# Altium PCB Slot.PcbDoc (part 3 of 4)
Units mm, origin at the board's own origin, x right, y up, seen from the top; angles counter-clockwise.
Board outline 152.4 x 101.6 mm, 2 copper layers (Top Layer, Bottom Layer); 34 components, 37 nets, 230 pads, 62 vias.
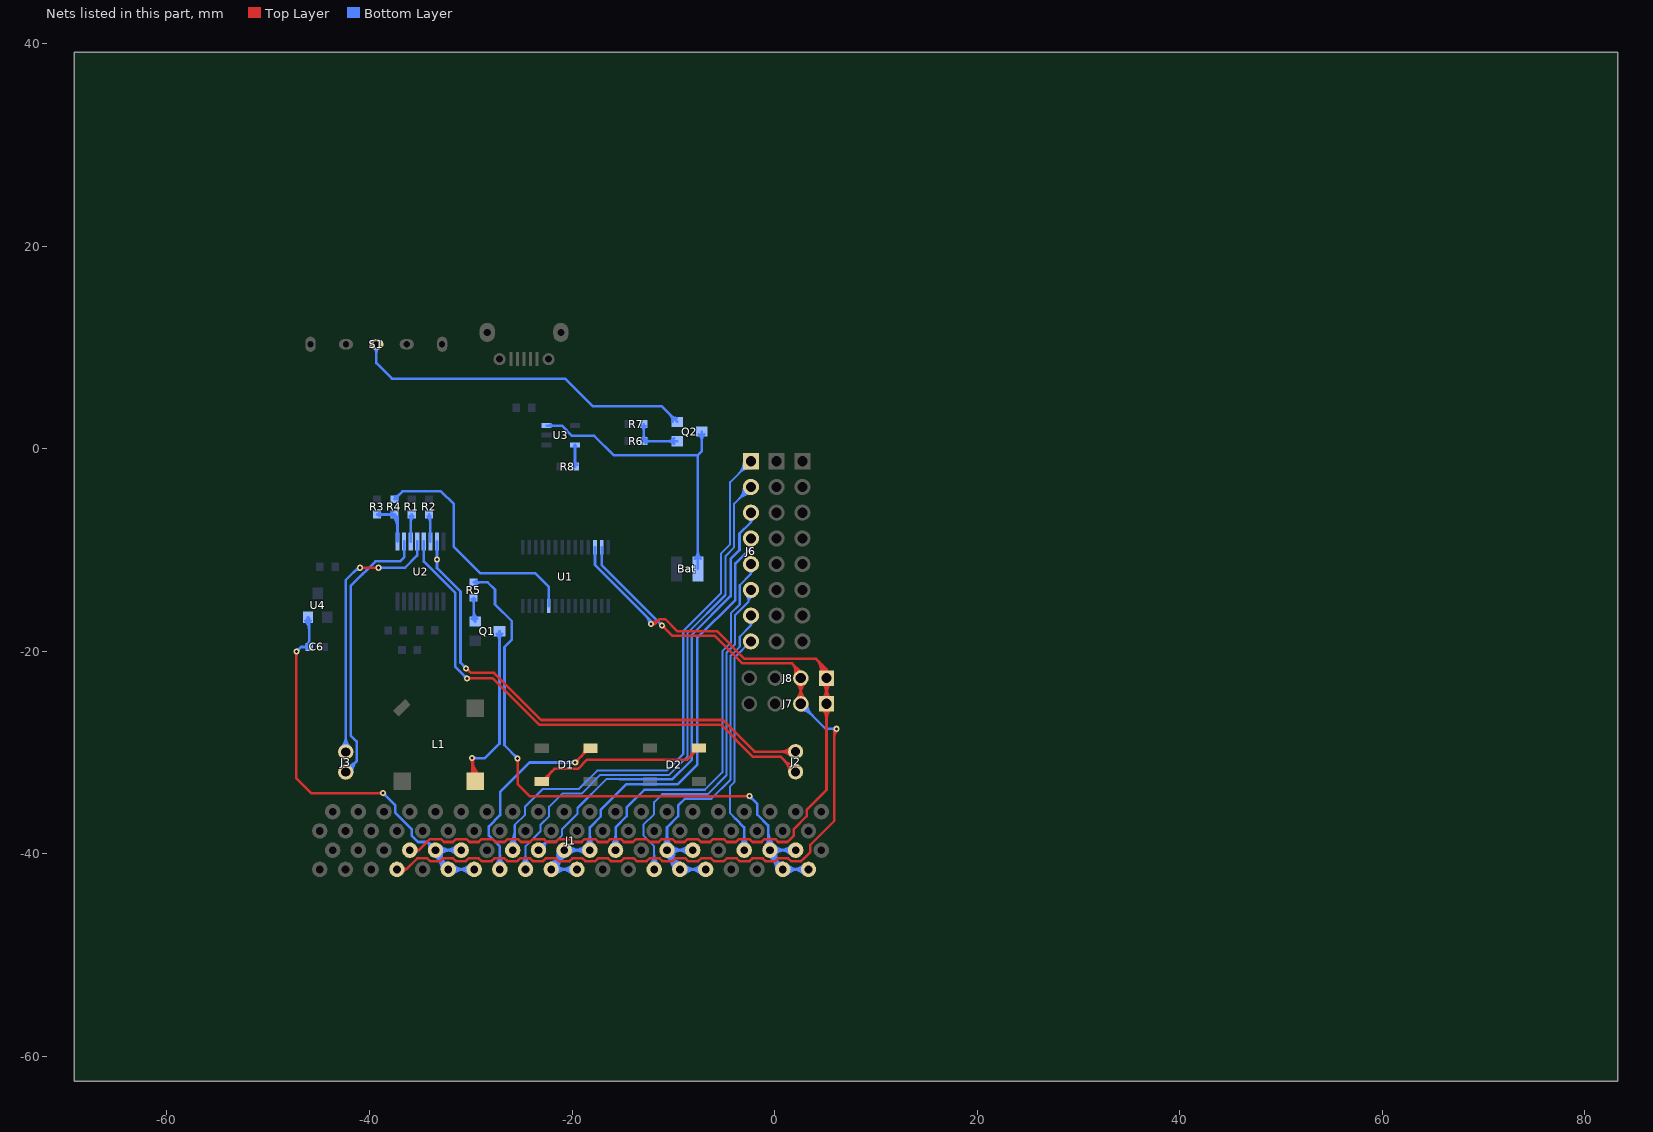
[diagram p3: the nets of this part, all layers, seen from the top]

## Via types
v1: diameter 0.6, hole 0.3, Top Layer to Bottom Layer, 62 vias

## Nets (pads, with @x,y where several pads share a name; then routed paths per layer and width w, separated by ;. In a path a pad name is that pad's centre, name@x,y a point inside that pad or via, vN(x,y) a via of type N, cw(c..) or ccw(c..) an arc to the next point about the centre after c; other vN are vias at no path point) (continued)
NetC6_2: C6.2 J1.55 J1.57 J1.59 J1.61 U4.2 | length 78.1
  Top Layer w0.254: -47.244,-20.53 cw(c-46.653,-20.53) v1@-47.071,-20.112 ; v1(-47.193,-19.99) -47.244,-20.041 -47.244,-32.512 -45.771,-33.985 v1(-38.659,-33.985) ; v1@-38.781,-34.108 ccw(c-39.076,-34.403) -39.076,-33.985 ccw(c-39.076,-33.568) v1@-38.781,-33.863
  Bottom Layer w0.254: v1(-47.193,-19.99) -46.761,-19.558 C6.2@-45.962,-19.558 -45.962,-16.746 U4.2@-46.071,-16.637 ; v1@-47.193,-19.817 ccw(c-47.193,-19.399) -46.898,-19.694 ccw(c-46.603,-19.99) v1@-47.02,-19.99 ; U4.2@-46.34,-16.97 cw(c-47.253,-17.882) -45.962,-17.882 ; U4.2@-46.16,-16.79 cw(c-46.639,-17.269) -45.962,-17.269 ; -45.962,-17.358 cw(c-45.413,-17.358) U4.2@-45.801,-16.97 ; v1@-38.659,-34.158 cw(c-38.659,-34.576) -38.363,-34.281 cw(c-38.068,-33.985) v1@-38.486,-33.985 ; v1(-38.659,-33.985) -37.468,-35.176 -37.468,-35.917 -35.842,-37.543 -35.842,-38.173 -35.202,-38.813 -34.288,-38.813 ; J1.61@-34.098,-39.477 ccw(c-34.79,-39.315) -34.288,-38.813 ; J1.61@-33.624,-39.003 cw(c-33.785,-38.311) -34.288,-38.813 ; J1.61@-33.606,-39.607 ccw(c-32.64,-39.716) -33.327,-40.403 ; J1.61@-33.48,-39.621 -34.288,-38.813 ; J1.61@-33.353,-39.635 ccw(c-31.971,-39.792) -32.955,-40.776 ; J1.61@-33.21,-39.89 cw(c-32.56,-40.541) -32.56,-39.621 cw(c-32.56,-38.701) J1.61@-33.21,-39.352 ; J1.61@-33.101,-39.664 ccw(c-31.302,-39.868) J1.59@-32.582,-41.148 ; J1.61@-33.031,-40.07 cw(c-31.947,-41.154) -31.947,-39.621 cw(c-31.947,-38.088) J1.61@-33.031,-39.172 ; J1.61@-32.849,-39.693 ccw(c-30.633,-39.944) J1.59@-32.21,-41.521 ; J1.59@-32.845,-41.521 ccw(c-34.378,-41.521) -33.294,-40.437 ccw(c-32.21,-39.353) J1.59@-32.21,-40.886 ; J1.59@-32.591,-41.521 ccw(c-33.51,-41.521) -32.86,-40.871 ccw(c-32.21,-40.22) J1.59@-32.21,-41.14 ; J1.59@-31.94,-41.79 cw(c-31.29,-42.441) -31.29,-41.521 cw(c-31.29,-40.601) J1.59@-31.94,-41.252 ; J1.59@-31.761,-41.97 cw(c-30.677,-43.054) -30.677,-41.521 cw(c-30.677,-39.988) J1.59@-31.761,-41.072 ; J1.57@-31.389,-40.07 ccw(c-32.473,-41.154) -32.473,-39.621 ccw(c-32.473,-38.088) J1.57@-31.389,-39.172 ; J1.57@-31.209,-39.89 ccw(c-31.859,-40.541) -31.859,-39.621 ccw(c-31.859,-38.701) J1.57@-31.209,-39.352 ; J1.57@-30.94,-39.621 -32.85,-39.621 -33.48,-40.251 J1.59@-32.21,-41.521 J1.55@-29.67,-41.521 ; J1.55@-30.119,-41.97 ccw(c-31.203,-43.054) -31.203,-41.521 ccw(c-31.203,-39.988) J1.55@-30.119,-41.072 ; J1.55@-29.939,-41.79 ccw(c-30.589,-42.441) -30.589,-41.521 ccw(c-30.589,-40.601) J1.55@-29.939,-41.252 ; -46.561,-19.558 ccw(c-46.561,-18.959) C6.2@-46.137,-19.383 ; -46.561,-19.558 cw(c-46.561,-20.157) C6.2@-46.137,-19.733 ; -46.561,-19.558 ccw(c-46.561,-18.959) C6.2@-46.137,-19.383 ; -46.561,-19.558 cw(c-46.561,-20.157) C6.2@-46.137,-19.733 ; -46.561,-19.558 ccw(c-46.561,-18.959) C6.2@-46.137,-19.383 ; -46.561,-19.558 cw(c-46.561,-20.157) C6.2@-46.137,-19.733 ; C6.2@-46.137,-19.358 ccw(c-46.561,-18.934) -45.962,-18.934 ; C6.2@-46.137,-19.358 ccw(c-46.561,-18.934) -45.962,-18.934 ; C6.2@-46.137,-19.358 ccw(c-46.561,-18.934) -45.962,-18.934 ; -45.962,-18.934 ccw(c-45.363,-18.934) C6.2@-45.787,-19.358 ; -45.962,-18.934 ccw(c-45.363,-18.934) C6.2@-45.787,-19.358 ; -45.962,-18.934 ccw(c-45.363,-18.934) C6.2@-45.787,-19.358
NetD1_2: D1.2 D2.4 | length 20.3
  Top Layer w0.254: D1.2@-22.989,-32.835 -21.747,-31.593 -19.424,-31.593 -18.515,-30.683 -8.611,-30.683 D2.4@-7.472,-29.544 ; D1.2@-22.67,-32.835 cw(c-21.9,-32.835) -22.445,-32.291 ; D1.2@-22.416,-32.835 cw(c-21.033,-32.835) -22.011,-31.857 ; -8.45,-30.522 ccw(c-9.429,-29.544) D2.4@-8.045,-29.544 ; -8.017,-30.089 ccw(c-8.561,-29.544) D2.4@-7.791,-29.544
NetJ2_1: J2.1 U2.7 | length 56
  Top Layer w0.254: v1@-30.455,-21.839 cw(c-30.455,-22.257) -30.159,-21.962 cw(c-29.864,-21.666) v1@-30.282,-21.666 ; v1(-30.455,-21.666) -29.997,-22.123 -27.7,-22.123 -23.052,-26.772 -5.105,-26.772 -1.988,-29.889 J2.1@2.08,-29.889 ; J2.1@1.64,-30.329 ccw(c0.576,-31.393) 0.576,-29.889 ccw(c0.576,-28.385) J2.1@1.64,-29.448 ; J2.1@1.819,-30.15 ccw(c1.19,-30.78) 1.19,-29.889 ccw(c1.19,-28.998) J2.1@1.819,-29.628
  Bottom Layer w0.254: v1@-33.459,-11.058 cw(c-33.754,-11.353) -33.336,-11.353 cw(c-32.919,-11.353) v1@-33.214,-11.058 ; v1@-33.459,-10.813 ccw(c-33.754,-10.518) -33.336,-10.518 ccw(c-32.919,-10.518) v1@-33.214,-10.813 ; U2.7@-33.336,-9.144 v1(-33.336,-10.936) -33.336,-11.774 -31.013,-14.097 -31.013,-21.107 v1(-30.455,-21.666) ; v1@-30.628,-21.666 ccw(c-31.045,-21.666) -30.75,-21.371 ccw(c-30.455,-21.076) v1@-30.455,-21.493
NetJ2_2: J2.2 U2.5 | length 56.6
  Top Layer w0.254: v1(-30.378,-22.657) -27.813,-22.657 -23.241,-27.229 -5.309,-27.229 -2.159,-30.378 0.57,-30.378 J2.2@2.08,-31.889 ; v1@-30.256,-22.779 cw(c-29.961,-23.074) -29.961,-22.657 cw(c-29.961,-22.239) v1@-30.256,-22.534 ; J2.2@1.457,-31.889 ccw(c-0.047,-31.889) 1.017,-30.825 ccw(c2.08,-29.762) J2.2@2.08,-31.266 ; J2.2@1.711,-31.889 ccw(c0.821,-31.889) 1.45,-31.259 ccw(c2.08,-30.629) J2.2@2.08,-31.52
  Bottom Layer w0.254: U2.5@-34.636,-9.144 -34.636,-11.12 -31.521,-14.235 -31.521,-21.514 v1(-30.378,-22.657) ; v1@-30.551,-22.657 ccw(c-30.969,-22.657) -30.674,-22.361 ccw(c-30.378,-22.066) v1@-30.378,-22.484
NetJ3_1: J3.1 U2.2 | length 30.8
  Bottom Layer w0.254: J3.1@-42.344,-31.921 -41.264,-30.841 -41.264,-28.878 -41.859,-28.283 -41.859,-13.538 -40.686,-12.365 -40.684,-12.365 -40.315,-11.996 -40.315,-11.994 -39.426,-11.105 -36.987,-11.105 -36.586,-10.704 U2.2@-36.586,-9.144 ; J3.1@-42.344,-31.552 ccw(c-42.344,-30.661) -41.714,-31.291 ccw(c-41.084,-31.921) J3.1@-41.975,-31.921 ; J3.1@-42.344,-31.298 ccw(c-42.344,-29.794) -41.281,-30.857 ccw(c-40.217,-31.921) J3.1@-41.721,-31.921
NetJ3_2: J3.2 U2.4 | length 34.1
  Top Layer w0.254: v1(-40.945,-11.735) v1(-39.091,-11.735) ; v1@-40.822,-11.857 cw(c-40.527,-12.152) -40.527,-11.735 cw(c-40.527,-11.317) v1@-40.822,-11.612 ; v1@-39.213,-11.857 ccw(c-39.508,-12.152) -39.508,-11.735 ccw(c-39.508,-11.317) v1@-39.213,-11.612
  Bottom Layer w0.254: J3.2@-42.785,-29.48 ccw(c-43.848,-28.417) -42.344,-28.417 ccw(c-40.84,-28.417) J3.2@-41.904,-29.48 ; J3.2@-42.605,-29.66 ccw(c-43.235,-29.03) -42.344,-29.03 ccw(c-41.453,-29.03) J3.2@-42.083,-29.66 ; J3.2@-42.344,-29.921 -42.344,-12.956 -41.123,-11.735 v1(-40.945,-11.735) ; v1(-39.091,-11.735) -36.474,-11.735 -35.286,-10.547 U2.4@-35.286,-9.144 ; v1@-38.968,-11.857 cw(c-38.673,-12.152) -38.673,-11.735 cw(c-38.673,-11.317) v1@-38.968,-11.612 ; -41.544,-12.156 cw(c-40.945,-12.755) v1@-40.945,-11.908 ; -41.544,-12.156 cw(c-40.945,-12.755) v1@-40.945,-11.908 ; -41.544,-12.156 cw(c-40.945,-12.755) v1@-40.945,-11.908
NetL1_2: L1.2 Q1.3 | length 25.4
  Top Layer w0.254: L1.2@-30.069,-32.3 ccw(c-30.548,-31.821) -29.87,-31.821 ; v1@-29.993,-30.653 cw(c-30.288,-30.948) -29.87,-30.948 cw(c-29.453,-30.948) v1@-29.748,-30.653 ; v1@-29.961,-30.678 cw(c-30.18,-31.033) -29.774,-30.937 cw(c-29.368,-30.841) v1@-29.723,-30.622 ; -29.87,-31.649 ccw(c-28.543,-31.649) L1.2@-29.416,-32.649 ; -29.87,-31.09 ccw(c-28.054,-31.09) L1.2@-29.249,-32.458 ; L1.2@-29.558,-32.811 -29.87,-32.498 v1(-29.87,-30.531) ccw(c-27.566,-30.531) L1.2@-29.082,-32.267
  Bottom Layer w0.254: v1(-29.87,-30.531) -28.6,-30.531 -27.166,-29.096 Q1.3@-27.166,-17.998 ; v1@-29.748,-30.653 cw(c-29.453,-30.948) -29.453,-30.531 cw(c-29.453,-30.113) v1@-29.748,-30.408 ; Q1.3@-27.435,-18.268 cw(c-28.085,-18.918) -27.166,-18.918 cw(c-26.246,-18.918) Q1.3@-26.896,-18.268
NetQ1_2: Q1.2 R5.2 | length 7.2
  Bottom Layer w0.254: Q1.2@-29.899,-16.779 ccw(c-30.334,-16.343) -29.718,-16.343 ; -29.718,-16.527 ccw(c-29.108,-16.527) Q1.2@-29.539,-16.959 ; -29.718,-15.914 ccw(c-28.495,-15.914) Q1.2@-29.36,-16.779 ; R5.2@-29.718,-14.683 -29.718,-16.896 Q1.2@-29.566,-17.048 ; R5.2@-29.893,-14.858 cw(c-30.317,-15.281) -29.718,-15.281 ; R5.2@-29.893,-14.858 cw(c-30.317,-15.281) -29.718,-15.281 ; R5.2@-29.893,-14.858 cw(c-30.317,-15.281) -29.718,-15.281 ; -29.718,-15.281 cw(c-29.119,-15.281) R5.2@-29.543,-14.858 ; -29.718,-15.281 cw(c-29.119,-15.281) R5.2@-29.543,-14.858 ; -29.718,-15.281 cw(c-29.119,-15.281) R5.2@-29.543,-14.858
NetQ2_1: Q2.1 R6.2 R7.2 | length 14.9
  Bottom Layer w0.254: R7.2@-12.923,2.454 R6.2@-12.923,0.762 Q2.1@-9.601,0.762 ; Q2.1@-9.934,0.493 ccw(c-10.585,-0.158) -10.585,0.762 ccw(c-10.585,1.682) Q2.1@-9.934,1.031 ; R6.2@-13.098,0.962 ccw(c-13.521,1.386) -12.923,1.386 ; R6.2@-13.098,0.962 ccw(c-13.521,1.386) -12.923,1.386 ; R6.2@-13.098,0.962 ccw(c-13.521,1.386) -12.923,1.386 ; R7.2@-13.098,2.254 cw(c-13.521,1.831) -12.923,1.831 ; R7.2@-13.098,2.254 cw(c-13.521,1.831) -12.923,1.831 ; R7.2@-13.098,2.254 cw(c-13.521,1.831) -12.923,1.831 ; -12.923,1.386 ccw(c-12.324,1.386) R6.2@-12.747,0.962 ; -12.923,1.386 ccw(c-12.324,1.386) R6.2@-12.747,0.962 ; -12.923,1.386 ccw(c-12.324,1.386) R6.2@-12.747,0.962 ; -12.923,1.831 cw(c-12.324,1.831) R7.2@-12.747,2.254 ; -12.923,1.831 cw(c-12.324,1.831) R7.2@-12.747,2.254 ; -12.923,1.831 cw(c-12.324,1.831) R7.2@-12.747,2.254 ; R6.2@-12.747,0.587 cw(c-12.324,0.163) -12.324,0.762 ; R6.2@-12.747,0.587 cw(c-12.324,0.163) -12.324,0.762 ; R6.2@-12.747,0.587 cw(c-12.324,0.163) -12.324,0.762 ; R6.2@-12.747,0.937 ccw(c-12.324,1.361) -12.324,0.762 ; R6.2@-12.747,0.937 ccw(c-12.324,1.361) -12.324,0.762 ; R6.2@-12.747,0.937 ccw(c-12.324,1.361) -12.324,0.762
NetQ2_2: Q2.2 S1.2 | length 36.9
  Bottom Layer w0.254: S1.2@-39.585,10.069 cw(c-40.222,9.432) -39.322,9.432 cw(c-38.421,9.432) S1.2@-39.058,10.069 ; S1.2@-39.322,10.333 -39.322,8.461 -37.795,6.934 -20.676,6.934 -17.932,4.191 -11.13,4.191 Q2.2@-9.601,2.662 ; -10.36,3.421 cw(c-11.119,2.662) Q2.2@-10.046,2.662 ; -10.207,3.268 ccw(c-9.665,3.81) Q2.2@-9.665,3.043
NetR1_1: R1.1 U2.3 | length 3.7
  Bottom Layer w0.254: R1.1@-36.027,-6.652 cw(c-36.246,-6.871) -35.936,-6.871 ; U2.3@-35.936,-9.144 -35.936,-6.587 R1.1@-35.827,-6.477 ; -35.936,-7.28 cw(c-35.048,-7.28) R1.1@-35.676,-6.652
NetR2_1: R2.1 U2.6 | length 3.5
  Bottom Layer w0.254: R2.1@-34.263,-6.652 cw(c-34.929,-7.319) -33.986,-7.319 ; R2.1@-34.112,-6.477 -33.986,-6.603 U2.6@-33.986,-9.144
NetR3_1: R3.1 R4.1 U2.1 | length 12.1
  Bottom Layer w0.254: R3.1@-39.243,-6.477 R4.1@-37.541,-6.477 -37.236,-6.782 U2.1@-37.236,-9.144 ; R4.1@-37.692,-6.652 cw(c-38.79,-7.751) -37.236,-7.751 ; R4.1@-37.512,-6.473 cw(c-38.177,-7.138) -37.236,-7.138 ; R3.1@-39.043,-6.652 cw(c-38.619,-7.076) -38.619,-6.477 ; R3.1@-39.043,-6.652 cw(c-38.619,-7.076) -38.619,-6.477 ; R3.1@-39.043,-6.652 cw(c-38.619,-7.076) -38.619,-6.477 ; R3.1@-39.043,-6.302 ccw(c-38.619,-5.878) -38.619,-6.477 ; R3.1@-39.043,-6.302 ccw(c-38.619,-5.878) -38.619,-6.477 ; R3.1@-39.043,-6.302 ccw(c-38.619,-5.878) -38.619,-6.477 ; -38.165,-6.477 ccw(c-38.165,-5.878) R4.1@-37.742,-6.302 ; -38.165,-6.477 cw(c-38.165,-7.076) R4.1@-37.742,-6.652 ; -38.165,-6.477 ccw(c-38.165,-5.878) R4.1@-37.742,-6.302 ; -38.165,-6.477 cw(c-38.165,-7.076) R4.1@-37.742,-6.652 ; -38.165,-6.477 ccw(c-38.165,-5.878) R4.1@-37.742,-6.302 ; -38.165,-6.477 cw(c-38.165,-7.076) R4.1@-37.742,-6.652
NetR8_2: R8.2 U3.5 | length 4.5
  Bottom Layer w0.254: R8.2@-19.859,-1.552 ccw(c-20.232,-1.179) -19.704,-1.179 ; -19.704,-1.079 ccw(c-19.035,-1.079) R8.2@-19.508,-1.552 ; U3.5@-19.704,0.406 -19.704,-1.732 R8.2@-19.684,-1.753 ; U3.5@-19.791,0.319 cw(c-20.001,0.109) -19.704,0.109 ; U3.5@-19.791,0.319 cw(c-20.001,0.109) -19.704,0.109 ; U3.5@-19.791,0.319 cw(c-20.001,0.109) -19.704,0.109 ; -19.704,0.109 cw(c-19.407,0.109) U3.5@-19.617,0.319 ; -19.704,0.109 cw(c-19.407,0.109) U3.5@-19.617,0.319 ; -19.704,0.109 cw(c-19.407,0.109) U3.5@-19.617,0.319
NSLEEP: R4.2 U1.10 | length 24.8
  Bottom Layer w0.254: R4.2@-37.541,-4.977 -36.755,-4.191 -32.944,-4.191 -31.674,-5.461 -31.674,-9.677 -29.058,-12.294 -23.622,-12.294 -22.284,-13.632 U1.10@-22.284,-15.519 ; R4.2@-37.516,-4.729 ccw(c-37.516,-4.191) -37.136,-4.571 ; R4.2@-37.268,-4.977 cw(c-36.609,-4.977) -37.075,-4.511
P0: J1.3 J1.5 J1.7 J1.9 R5.1 | length 93.7
  Top Layer w0.254: v1@-25.497,-30.679 cw(c-25.792,-30.974) -25.375,-30.974 cw(c-24.957,-30.974) v1@-25.252,-30.679 ; v1(-25.375,-30.556) -25.375,-33.096 -24.181,-34.29 v1(-2.464,-34.29) ; v1@-2.586,-34.412 ccw(c-2.881,-34.708) -2.881,-34.29 ccw(c-2.881,-33.872) v1@-2.586,-34.168
  Bottom Layer w0.254: R5.1@-29.718,-13.183 -28.321,-13.183 -27.61,-13.894 -27.61,-15.342 -25.933,-17.018 -25.933,-18.821 -26.67,-19.558 -26.67,-29.261 v1(-25.375,-30.556) ; v1@-25.548,-30.556 ccw(c-25.965,-30.556) -25.67,-30.261 ccw(c-25.375,-29.966) v1@-25.375,-30.383 ; v1@-2.464,-34.463 cw(c-2.464,-34.881) -2.168,-34.585 cw(c-1.873,-34.29) v1@-2.291,-34.29 ; v1(-2.464,-34.29) -1.702,-35.052 -1.702,-36.123 -0.638,-37.187 -0.638,-39.443 J1.9@-0.46,-39.621 J1.5@2.08,-39.621 ; J1.9@-0.909,-39.172 ccw(c-1.563,-38.518) -0.638,-38.518 ; -0.638,-38.271 ccw(c0.89,-38.271) -0.19,-39.352 ccw(c0.46,-38.701) 0.46,-39.621 ccw(c0.46,-40.541) J1.9@-0.19,-39.89 ; -0.638,-37.658 ccw(c1.503,-37.658) -0.011,-39.172 ccw(c1.073,-38.088) 1.073,-39.621 ccw(c1.073,-41.154) J1.9@-0.011,-40.07 ; J1.9@-0.586,-39.607 ccw(c0.38,-39.716) -0.307,-40.403 ; J1.9@-0.46,-40.251 J1.7@0.81,-41.521 J1.3@3.35,-41.521 ; J1.9@-0.333,-39.635 ccw(c1.049,-39.792) 0.065,-40.776 ; J1.9@-0.081,-39.664 ccw(c1.718,-39.868) J1.7@0.438,-41.148 ; J1.9@0.171,-39.693 ccw(c2.387,-39.944) J1.7@0.81,-41.521 ; J1.7@0.175,-41.521 ccw(c-1.358,-41.521) -0.274,-40.437 ccw(c0.81,-39.353) J1.7@0.81,-40.886 ; J1.7@0.429,-41.521 ccw(c-0.49,-41.521) 0.16,-40.871 ccw(c0.81,-40.22) J1.7@0.81,-41.14 ; J1.7@1.08,-41.79 cw(c1.73,-42.441) 1.73,-41.521 cw(c1.73,-40.601) J1.7@1.08,-41.252 ; J1.7@1.259,-41.97 cw(c2.343,-43.054) 2.343,-41.521 cw(c2.343,-39.988) J1.7@1.259,-41.072 ; J1.5@1.631,-40.07 ccw(c0.547,-41.154) 0.547,-39.621 ccw(c0.547,-38.088) J1.5@1.631,-39.172 ; J1.5@1.811,-39.89 ccw(c1.161,-40.541) 1.161,-39.621 ccw(c1.161,-38.701) J1.5@1.811,-39.352 ; J1.3@2.901,-41.97 ccw(c1.817,-43.054) 1.817,-41.521 ccw(c1.817,-39.988) J1.3@2.901,-41.072 ; J1.3@3.081,-41.79 ccw(c2.431,-42.441) 2.431,-41.521 ccw(c2.431,-40.601) J1.3@3.081,-41.252 ; R5.1@-29.518,-13.358 cw(c-29.094,-13.781) -29.094,-13.183 ; R5.1@-29.518,-13.358 cw(c-29.094,-13.781) -29.094,-13.183 ; R5.1@-29.518,-13.358 cw(c-29.094,-13.781) -29.094,-13.183 ; R5.1@-29.518,-13.007 ccw(c-29.094,-12.584) -29.094,-13.183 ; R5.1@-29.518,-13.007 ccw(c-29.094,-12.584) -29.094,-13.183 ; R5.1@-29.518,-13.007 ccw(c-29.094,-12.584) -29.094,-13.183
P1: J1.19 J1.21 J1.23 J1.25 J6.7 | length 166.4
  Bottom Layer w0.203: -8.866,-34.545 -6.25,-34.545 -4.344,-32.639 -4.344,-20.422 -3.441,-19.52 -3.441,-18.542 -2.337,-17.437 ; J6.7@-2.337,-16.459 -2.337,-17.437 ; J6.7@-2.563,-17.12 cw(c-2.672,-17.437) -2.337,-17.437 ; J6.7@-2.563,-17.12 cw(c-2.672,-17.437) -2.337,-17.437 ; J6.7@-2.563,-17.12 cw(c-2.672,-17.437) -2.337,-17.437 ; -2.337,-17.437 cw(c-2.001,-17.437) J6.7@-2.11,-17.12 ; -2.337,-17.437 cw(c-2.001,-17.437) J6.7@-2.11,-17.12 ; -2.337,-17.437 cw(c-2.001,-17.437) J6.7@-2.11,-17.12
  Bottom Layer w0.254: J1.25@-10.62,-39.621 -10.62,-37.365 -9.528,-36.273 -9.528,-35.207 -8.866,-34.545 ; -9.945,-40.63 cw(c-10.223,-41.342) J1.23@-9.474,-41.495 ; -9.664,-40.74 cw(c-9.923,-41.403) J1.23@-9.225,-41.547 ; J1.21@-8.08,-39.621 -9.99,-39.621 -10.62,-40.251 J1.23@-9.35,-41.521 J1.19@-6.81,-41.521 ; J1.25@-11.069,-39.172 ccw(c-12.153,-38.088) -10.62,-38.088 ; J1.25@-11.069,-39.172 ccw(c-12.153,-38.088) -10.62,-38.088 ; J1.25@-11.069,-39.172 ccw(c-12.153,-38.088) -10.62,-38.088 ; J1.25@-10.889,-39.352 ccw(c-11.539,-38.701) -10.62,-38.701 ; J1.25@-10.889,-39.352 ccw(c-11.539,-38.701) -10.62,-38.701 ; J1.25@-10.889,-39.352 ccw(c-11.539,-38.701) -10.62,-38.701 ; J1.25@-10.746,-39.607 ccw(c-9.78,-39.716) -10.467,-40.403 ; J1.25@-10.746,-39.607 ccw(c-9.78,-39.716) -10.467,-40.403 ; J1.25@-10.746,-39.607 ccw(c-9.78,-39.716) -10.467,-40.403 ; J1.25@-10.689,-39.727 cw(c-11.427,-40.858) -10.092,-40.657 ; J1.25@-10.689,-39.727 cw(c-11.427,-40.858) -10.092,-40.657 ; J1.25@-10.689,-39.727 cw(c-11.427,-40.858) -10.092,-40.657 ; J1.25@-10.62,-40.256 cw(c-10.62,-41.166) -9.976,-40.522 ; J1.25@-10.62,-40.256 cw(c-10.62,-41.166) -9.976,-40.522 ; J1.25@-10.62,-40.256 cw(c-10.62,-41.166) -9.976,-40.522 ; J1.25@-10.62,-40.256 cw(c-10.62,-41.166) -9.976,-40.522 ; -10.62,-38.701 ccw(c-9.7,-38.701) J1.25@-10.35,-39.352 ; -10.62,-38.701 ccw(c-9.7,-38.701) J1.25@-10.35,-39.352 ; -10.62,-38.701 ccw(c-9.7,-38.701) J1.25@-10.35,-39.352 ; -10.62,-38.088 ccw(c-9.087,-38.088) J1.25@-10.171,-39.172 ; -10.62,-38.088 ccw(c-9.087,-38.088) J1.25@-10.171,-39.172 ; -10.62,-38.088 ccw(c-9.087,-38.088) J1.25@-10.171,-39.172 ; J1.25@-10.544,-39.519 cw(c-11.607,-40.956) -9.839,-40.691 ; J1.25@-10.544,-39.519 cw(c-11.607,-40.956) -9.839,-40.691 ; J1.25@-10.544,-39.519 cw(c-11.607,-40.956) -9.839,-40.691 ; J1.25@-10.493,-39.635 ccw(c-9.111,-39.792) -10.095,-40.776 ; J1.25@-10.493,-39.635 ccw(c-9.111,-39.792) -10.095,-40.776 ; J1.25@-10.493,-39.635 ccw(c-9.111,-39.792) -10.095,-40.776 ; -10.434,-40.437 ccw(c-9.35,-39.353) J1.23@-9.35,-40.886 ; -10.434,-40.437 cw(c-11.518,-41.521) J1.23@-9.985,-41.521 ; -10.434,-40.437 ccw(c-9.35,-39.353) J1.23@-9.35,-40.886 ; -10.434,-40.437 cw(c-11.518,-41.521) J1.23@-9.985,-41.521 ; -10.434,-40.437 ccw(c-9.35,-39.353) J1.23@-9.35,-40.886 ; -10.434,-40.437 cw(c-11.518,-41.521) J1.23@-9.985,-41.521 ; J1.25@-10.393,-39.315 cw(c-11.091,-40.259) -9.93,-40.085 ; J1.25@-10.393,-39.315 cw(c-11.091,-40.259) -9.93,-40.085 ; J1.25@-10.393,-39.315 cw(c-11.091,-40.259) -9.93,-40.085 ; J1.25@-10.35,-39.89 cw(c-9.7,-40.541) -9.7,-39.621 ; J1.25@-10.35,-39.89 cw(c-9.7,-40.541) -9.7,-39.621 ; J1.25@-10.35,-39.89 cw(c-9.7,-40.541) -9.7,-39.621 ; J1.25@-10.35,-39.352 ccw(c-9.7,-38.701) -9.7,-39.621 ; J1.25@-10.35,-39.352 ccw(c-9.7,-38.701) -9.7,-39.621 ; J1.25@-10.35,-39.352 ccw(c-9.7,-38.701) -9.7,-39.621 ; J1.25@-10.254,-39.727 ccw(c-9.573,-39.924) -10.074,-40.425 ; J1.25@-10.254,-39.727 ccw(c-9.573,-39.924) -10.074,-40.425 ; J1.25@-10.254,-39.727 ccw(c-9.573,-39.924) -10.074,-40.425 ; J1.25@-10.254,-39.727 ccw(c-9.573,-39.924) -10.074,-40.425 ; J1.25@-10.241,-39.664 ccw(c-8.442,-39.868) J1.23@-9.722,-41.148 ; J1.25@-10.241,-39.664 ccw(c-8.442,-39.868) J1.23@-9.722,-41.148 ; J1.25@-10.241,-39.664 ccw(c-8.442,-39.868) J1.23@-9.722,-41.148 ; J1.25@-10.23,-40.269 ccw(c-9.141,-39.64) J1.23@-9.28,-40.89 ; J1.25@-10.23,-40.269 ccw(c-9.141,-39.64) J1.23@-9.28,-40.89 ; J1.25@-10.23,-40.269 ccw(c-9.141,-39.64) J1.23@-9.28,-40.89 ; J1.25@-10.171,-40.07 cw(c-9.087,-41.154) -9.087,-39.621 ; J1.25@-10.171,-40.07 cw(c-9.087,-41.154) -9.087,-39.621 ; J1.25@-10.171,-40.07 cw(c-9.087,-41.154) -9.087,-39.621 ; J1.25@-10.171,-39.172 ccw(c-9.087,-38.088) -9.087,-39.621 ; J1.25@-10.171,-39.172 ccw(c-9.087,-38.088) -9.087,-39.621 ; J1.25@-10.171,-39.172 ccw(c-9.087,-38.088) -9.087,-39.621 ; -10.146,-40.919 ccw(c-9.173,-40.659) J1.23@-9.375,-41.645 ; -10.146,-40.919 ccw(c-9.173,-40.659) J1.23@-9.375,-41.645 ; -10.146,-40.919 ccw(c-9.173,-40.659) J1.23@-9.375,-41.645 ; -10.07,-40.547 cw(c-10.994,-41.08) J1.23@-9.963,-41.357 ; -10.07,-40.547 cw(c-10.994,-41.08) J1.23@-9.963,-41.357 ; -10.07,-40.547 cw(c-10.994,-41.08) J1.23@-9.963,-41.357 ; J1.25@-10.01,-39.797 ccw(c-9.101,-40.06) -9.77,-40.729 ; J1.25@-10.01,-39.797 ccw(c-9.101,-40.06) -9.77,-40.729 ; J1.25@-10.01,-39.797 ccw(c-9.101,-40.06) -9.77,-40.729 ; J1.25@-10.01,-39.797 ccw(c-9.101,-40.06) -9.77,-40.729 ; -10,-40.871 ccw(c-9.35,-40.22) J1.23@-9.35,-41.14 ; -10,-40.871 cw(c-10.65,-41.521) J1.23@-9.731,-41.521 ; -10,-40.871 ccw(c-9.35,-40.22) J1.23@-9.35,-41.14 ; -10,-40.871 cw(c-10.65,-41.521) J1.23@-9.731,-41.521 ; -10,-40.871 ccw(c-9.35,-40.22) J1.23@-9.35,-41.14 ; -10,-40.871 cw(c-10.65,-41.521) J1.23@-9.731,-41.521 ; J1.25@-9.989,-39.693 ccw(c-7.773,-39.944) J1.23@-9.35,-41.521 ; J1.25@-9.989,-39.693 ccw(c-7.773,-39.944) J1.23@-9.35,-41.521 ; J1.25@-9.989,-39.693 ccw(c-7.773,-39.944) J1.23@-9.35,-41.521 ; -9.979,-40.703 ccw(c-9.209,-40.259) J1.23@-9.308,-41.142 ; -9.979,-40.703 ccw(c-9.209,-40.259) J1.23@-9.308,-41.142 ; -9.979,-40.703 ccw(c-9.209,-40.259) J1.23@-9.308,-41.142 ; -9.951,-40.725 cw(c-10.212,-41.698) J1.23@-9.225,-41.496 ; -9.951,-40.725 cw(c-10.212,-41.698) J1.23@-9.225,-41.496 ; -9.951,-40.725 cw(c-10.212,-41.698) J1.23@-9.225,-41.496 ; -9.927,-40.521 ccw(c-9.293,-40.155) J1.23@-9.323,-40.887 ; -9.927,-40.521 cw(c-10.561,-40.887) J1.23@-9.912,-41.227 ; -9.927,-40.521 ccw(c-9.293,-40.155) J1.23@-9.323,-40.887 ; -9.927,-40.521 cw(c-10.561,-40.887) J1.23@-9.912,-41.227 ; -9.927,-40.521 ccw(c-9.293,-40.155) J1.23@-9.323,-40.887 ; -9.927,-40.521 cw(c-10.561,-40.887) J1.23@-9.912,-41.227 ; -9.613,-39.621 ccw(c-9.613,-38.088) J1.21@-8.529,-39.172 ; -9.613,-39.621 cw(c-9.613,-41.154) J1.21@-8.529,-40.07 ; -9.613,-39.621 ccw(c-9.613,-38.088) J1.21@-8.529,-39.172 ; -9.613,-39.621 cw(c-9.613,-41.154) J1.21@-8.529,-40.07 ; -9.613,-39.621 ccw(c-9.613,-38.088) J1.21@-8.529,-39.172 ; -9.613,-39.621 cw(c-9.613,-41.154) J1.21@-8.529,-40.07 ; J1.23@-9.08,-41.79 cw(c-8.43,-42.441) -8.43,-41.521 ; J1.23@-9.08,-41.79 cw(c-8.43,-42.441) -8.43,-41.521 ; J1.23@-9.08,-41.79 cw(c-8.43,-42.441) -8.43,-41.521 ; J1.23@-9.08,-41.252 ccw(c-8.43,-40.601) -8.43,-41.521 ; J1.23@-9.08,-41.252 ccw(c-8.43,-40.601) -8.43,-41.521 ; J1.23@-9.08,-41.252 ccw(c-8.43,-40.601) -8.43,-41.521 ; -8.999,-39.621 ccw(c-8.999,-38.701) J1.21@-8.349,-39.352 ; -8.999,-39.621 cw(c-8.999,-40.541) J1.21@-8.349,-39.89 ; -8.999,-39.621 ccw(c-8.999,-38.701) J1.21@-8.349,-39.352 ; -8.999,-39.621 cw(c-8.999,-40.541) J1.21@-8.349,-39.89 ; -8.999,-39.621 ccw(c-8.999,-38.701) J1.21@-8.349,-39.352 ; -8.999,-39.621 cw(c-8.999,-40.541) J1.21@-8.349,-39.89 ; J1.23@-8.901,-41.97 cw(c-7.817,-43.054) -7.817,-41.521 ; J1.23@-8.901,-41.97 cw(c-7.817,-43.054) -7.817,-41.521 ; J1.23@-8.901,-41.97 cw(c-7.817,-43.054) -7.817,-41.521 ; J1.23@-8.901,-41.072 ccw(c-7.817,-39.988) -7.817,-41.521 ; J1.23@-8.901,-41.072 ccw(c-7.817,-39.988) -7.817,-41.521 ; J1.23@-8.901,-41.072 ccw(c-7.817,-39.988) -7.817,-41.521 ; -8.343,-41.521 ccw(c-8.343,-39.988) J1.19@-7.259,-41.072 ; -8.343,-41.521 cw(c-8.343,-43.054) J1.19@-7.259,-41.97 ; -8.343,-41.521 ccw(c-8.343,-39.988) J1.19@-7.259,-41.072 ; -8.343,-41.521 cw(c-8.343,-43.054) J1.19@-7.259,-41.97 ; -8.343,-41.521 ccw(c-8.343,-39.988) J1.19@-7.259,-41.072 ; -8.343,-41.521 cw(c-8.343,-43.054) J1.19@-7.259,-41.97 ; -7.729,-41.521 ccw(c-7.729,-40.601) J1.19@-7.079,-41.252 ; -7.729,-41.521 cw(c-7.729,-42.441) J1.19@-7.079,-41.79 ; -7.729,-41.521 ccw(c-7.729,-40.601) J1.19@-7.079,-41.252 ; -7.729,-41.521 cw(c-7.729,-42.441) J1.19@-7.079,-41.79 ; -7.729,-41.521 ccw(c-7.729,-40.601) J1.19@-7.079,-41.252 ; -7.729,-41.521 cw(c-7.729,-42.441) J1.19@-7.079,-41.79
P2: J1.37 J1.39 J1.41 J1.43 J6.4 | length 178.5
  Bottom Layer w0.254: J1.43@-22.174,-41.547 cw(c-21.476,-41.403) -21.735,-40.74 ; J1.43@-21.925,-41.495 cw(c-21.177,-41.342) -21.455,-40.63 ; J1.39@-19.51,-41.521 J1.43@-22.05,-41.521 ; J6.4@-2.337,-8.839 -2.337,-9.781 ; J1.43@-22.174,-41.496 cw(c-21.187,-41.698) -21.448,-40.725 ; J1.43@-22.174,-41.496 cw(c-21.187,-41.698) -21.448,-40.725 ; J1.43@-22.174,-41.496 cw(c-21.187,-41.698) -21.448,-40.725 ; J1.43@-22.12,-40.89 ccw(c-22.258,-39.64) J1.41@-21.169,-40.269 ; J1.43@-22.12,-40.89 ccw(c-22.258,-39.64) J1.41@-21.169,-40.269 ; J1.43@-22.12,-40.89 ccw(c-22.258,-39.64) J1.41@-21.169,-40.269 ; J1.43@-22.092,-41.142 ccw(c-22.19,-40.259) -21.42,-40.703 ; J1.43@-22.092,-41.142 ccw(c-22.19,-40.259) -21.42,-40.703 ; J1.43@-22.092,-41.142 ccw(c-22.19,-40.259) -21.42,-40.703 ; J1.43@-22.076,-40.887 ccw(c-22.106,-40.155) -21.472,-40.521 ; J1.43@-22.076,-40.887 ccw(c-22.106,-40.155) -21.472,-40.521 ; J1.43@-22.076,-40.887 ccw(c-22.106,-40.155) -21.472,-40.521 ; J1.43@-22.05,-41.521 ccw(c-23.626,-39.944) J1.41@-21.411,-39.693 ; J1.43@-22.05,-41.521 ccw(c-23.626,-39.944) J1.41@-21.411,-39.693 ; J1.43@-22.05,-41.521 ccw(c-23.626,-39.944) J1.41@-21.411,-39.693 ; J1.43@-22.05,-41.521 -20.15,-39.621 J1.37@-18.24,-39.621 -18.24,-37.365 -17.148,-36.273 -17.148,-35.613 -14.656,-33.122 -9.576,-33.122 -7.645,-31.191 -7.645,-18.694 -3.873,-14.922 -3.873,-11.317 -2.337,-9.781 ; J1.43@-22.05,-41.14 ccw(c-22.05,-40.22) -21.399,-40.871 ; J1.43@-22.05,-41.14 ccw(c-22.05,-40.22) -21.399,-40.871 ; J1.43@-22.05,-41.14 ccw(c-22.05,-40.22) -21.399,-40.871 ; J1.43@-22.05,-40.886 ccw(c-22.05,-39.353) -20.966,-40.437 ; J1.43@-22.05,-40.886 ccw(c-22.05,-39.353) -20.966,-40.437 ; J1.43@-22.05,-40.886 ccw(c-22.05,-39.353) -20.966,-40.437 ; J1.43@-22.024,-41.645 ccw(c-22.226,-40.659) -21.253,-40.919 ; J1.43@-22.024,-41.645 ccw(c-22.226,-40.659) -21.253,-40.919 ; J1.43@-22.024,-41.645 ccw(c-22.226,-40.659) -21.253,-40.919 ; J1.43@-21.78,-41.79 cw(c-21.13,-42.441) -21.13,-41.521 ; J1.43@-21.78,-41.79 cw(c-21.13,-42.441) -21.13,-41.521 ; J1.43@-21.78,-41.79 cw(c-21.13,-42.441) -21.13,-41.521 ; J1.43@-21.78,-41.252 ccw(c-21.13,-40.601) -21.13,-41.521 ; J1.43@-21.78,-41.252 ccw(c-21.13,-40.601) -21.13,-41.521 ; J1.43@-21.78,-41.252 ccw(c-21.13,-40.601) -21.13,-41.521 ; J1.43@-21.677,-41.148 ccw(c-22.957,-39.868) J1.41@-21.158,-39.664 ; J1.43@-21.677,-41.148 ccw(c-22.957,-39.868) J1.41@-21.158,-39.664 ; J1.43@-21.677,-41.148 ccw(c-22.957,-39.868) J1.41@-21.158,-39.664 ; J1.43@-21.669,-41.521 cw(c-20.749,-41.521) -21.399,-40.871 ; J1.43@-21.669,-41.521 cw(c-20.749,-41.521) -21.399,-40.871 ; J1.43@-21.669,-41.521 cw(c-20.749,-41.521) -21.399,-40.871 ; -21.629,-40.729 ccw(c-22.298,-40.06) J1.41@-21.39,-39.797 ; -21.629,-40.729 ccw(c-22.298,-40.06) J1.41@-21.39,-39.797 ; -21.629,-40.729 ccw(c-22.298,-40.06) J1.41@-21.39,-39.797 ; -21.629,-40.729 ccw(c-22.298,-40.06) J1.41@-21.39,-39.797 ; J1.43@-21.601,-41.97 cw(c-20.517,-43.054) -20.517,-41.521 ; J1.43@-21.601,-41.97 cw(c-20.517,-43.054) -20.517,-41.521 ; J1.43@-21.601,-41.97 cw(c-20.517,-43.054) -20.517,-41.521 ; J1.43@-21.601,-41.072 ccw(c-20.517,-39.988) -20.517,-41.521 ; J1.43@-21.601,-41.072 ccw(c-20.517,-39.988) -20.517,-41.521 ; J1.43@-21.601,-41.072 ccw(c-20.517,-39.988) -20.517,-41.521 ; -21.56,-40.691 cw(c-19.793,-40.956) J1.41@-20.855,-39.519 ; -21.56,-40.691 cw(c-19.793,-40.956) J1.41@-20.855,-39.519 ; -21.56,-40.691 cw(c-19.793,-40.956) J1.41@-20.855,-39.519 ; J1.43@-21.487,-41.227 cw(c-20.838,-40.887) -21.472,-40.521 ; J1.43@-21.487,-41.227 cw(c-20.838,-40.887) -21.472,-40.521 ; J1.43@-21.487,-41.227 cw(c-20.838,-40.887) -21.472,-40.521 ; -21.469,-40.085 cw(c-20.308,-40.259) J1.41@-21.006,-39.315 ; -21.469,-40.085 cw(c-20.308,-40.259) J1.41@-21.006,-39.315 ; -21.469,-40.085 cw(c-20.308,-40.259) J1.41@-21.006,-39.315 ; J1.43@-21.436,-41.357 cw(c-20.405,-41.08) -21.33,-40.547 ; J1.43@-21.436,-41.357 cw(c-20.405,-41.08) -21.33,-40.547 ; J1.43@-21.436,-41.357 cw(c-20.405,-41.08) -21.33,-40.547 ; -21.423,-40.522 cw(c-20.78,-41.166) J1.41@-20.78,-40.256 ; -21.423,-40.522 cw(c-20.78,-41.166) J1.41@-20.78,-40.256 ; -21.423,-40.522 cw(c-20.78,-41.166) J1.41@-20.78,-40.256 ; -21.423,-40.522 cw(c-20.78,-41.166) J1.41@-20.78,-40.256 ; J1.43@-21.415,-41.521 cw(c-19.882,-41.521) -20.966,-40.437 ; J1.43@-21.415,-41.521 cw(c-19.882,-41.521) -20.966,-40.437 ; J1.43@-21.415,-41.521 cw(c-19.882,-41.521) -20.966,-40.437 ; -21.325,-40.425 ccw(c-21.826,-39.924) J1.41@-21.146,-39.727 ; -21.325,-40.425 ccw(c-21.826,-39.924) J1.41@-21.146,-39.727 ; -21.325,-40.425 ccw(c-21.826,-39.924) J1.41@-21.146,-39.727 ; -21.325,-40.425 ccw(c-21.826,-39.924) J1.41@-21.146,-39.727 ; -21.307,-40.657 cw(c-19.972,-40.858) J1.41@-20.71,-39.727 ; -21.307,-40.657 cw(c-19.972,-40.858) J1.41@-20.71,-39.727 ; -21.307,-40.657 cw(c-19.972,-40.858) J1.41@-20.71,-39.727 ; -21.304,-40.776 ccw(c-22.288,-39.792) J1.41@-20.906,-39.635 ; -21.304,-40.776 ccw(c-22.288,-39.792) J1.41@-20.906,-39.635 ; -21.304,-40.776 ccw(c-22.288,-39.792) J1.41@-20.906,-39.635 ; -21.043,-41.521 ccw(c-21.043,-39.988) J1.39@-19.959,-41.072 ; -21.043,-41.521 cw(c-21.043,-43.054) J1.39@-19.959,-41.97 ; -21.043,-41.521 ccw(c-21.043,-39.988) J1.39@-19.959,-41.072 ; -21.043,-41.521 cw(c-21.043,-43.054) J1.39@-19.959,-41.97 ; -21.043,-41.521 ccw(c-21.043,-39.988) J1.39@-19.959,-41.072 ; -21.043,-41.521 cw(c-21.043,-43.054) J1.39@-19.959,-41.97 ; -20.932,-40.403 ccw(c-21.619,-39.716) J1.41@-20.653,-39.607 ; -20.932,-40.403 ccw(c-21.619,-39.716) J1.41@-20.653,-39.607 ; -20.932,-40.403 ccw(c-21.619,-39.716) J1.41@-20.653,-39.607 ; J1.41@-20.51,-39.89 cw(c-19.86,-40.541) -19.86,-39.621 ; J1.41@-20.51,-39.89 cw(c-19.86,-40.541) -19.86,-39.621 ; J1.41@-20.51,-39.89 cw(c-19.86,-40.541) -19.86,-39.621 ; J1.41@-20.51,-39.352 ccw(c-19.86,-38.701) -19.86,-39.621 ; J1.41@-20.51,-39.352 ccw(c-19.86,-38.701) -19.86,-39.621 ; J1.41@-20.51,-39.352 ccw(c-19.86,-38.701) -19.86,-39.621 ; -20.429,-41.521 ccw(c-20.429,-40.601) J1.39@-19.779,-41.252 ; -20.429,-41.521 cw(c-20.429,-42.441) J1.39@-19.779,-41.79 ; -20.429,-41.521 ccw(c-20.429,-40.601) J1.39@-19.779,-41.252 ; -20.429,-41.521 cw(c-20.429,-42.441) J1.39@-19.779,-41.79 ; -20.429,-41.521 ccw(c-20.429,-40.601) J1.39@-19.779,-41.252 ; -20.429,-41.521 cw(c-20.429,-42.441) J1.39@-19.779,-41.79 ; J1.41@-20.331,-40.07 cw(c-19.247,-41.154) -19.247,-39.621 ; J1.41@-20.331,-40.07 cw(c-19.247,-41.154) -19.247,-39.621 ; J1.41@-20.331,-40.07 cw(c-19.247,-41.154) -19.247,-39.621 ; J1.41@-20.331,-39.172 ccw(c-19.247,-38.088) -19.247,-39.621 ; J1.41@-20.331,-39.172 ccw(c-19.247,-38.088) -19.247,-39.621 ; J1.41@-20.331,-39.172 ccw(c-19.247,-38.088) -19.247,-39.621 ; -19.773,-39.621 ccw(c-19.773,-38.088) J1.37@-18.689,-39.172 ; -19.773,-39.621 cw(c-19.773,-41.154) J1.37@-18.689,-40.07 ; -19.773,-39.621 ccw(c-19.773,-38.088) J1.37@-18.689,-39.172 ; -19.773,-39.621 cw(c-19.773,-41.154) J1.37@-18.689,-40.07 ; -19.773,-39.621 ccw(c-19.773,-38.088) J1.37@-18.689,-39.172 ; -19.773,-39.621 cw(c-19.773,-41.154) J1.37@-18.689,-40.07 ; -19.159,-39.621 ccw(c-19.159,-38.701) J1.37@-18.509,-39.352 ; -19.159,-39.621 cw(c-19.159,-40.541) J1.37@-18.509,-39.89 ; -19.159,-39.621 ccw(c-19.159,-38.701) J1.37@-18.509,-39.352 ; -19.159,-39.621 cw(c-19.159,-40.541) J1.37@-18.509,-39.89 ; -19.159,-39.621 ccw(c-19.159,-38.701) J1.37@-18.509,-39.352 ; -19.159,-39.621 cw(c-19.159,-40.541) J1.37@-18.509,-39.89 ; J1.37@-18.689,-39.172 ccw(c-19.773,-38.088) -18.24,-38.088 ; J1.37@-18.689,-39.172 ccw(c-19.773,-38.088) -18.24,-38.088 ; J1.37@-18.689,-39.172 ccw(c-19.773,-38.088) -18.24,-38.088 ; J1.37@-18.509,-39.352 ccw(c-19.159,-38.701) -18.24,-38.701 ; J1.37@-18.509,-39.352 ccw(c-19.159,-38.701) -18.24,-38.701 ; J1.37@-18.509,-39.352 ccw(c-19.159,-38.701) -18.24,-38.701 ; -18.24,-38.701 ccw(c-17.32,-38.701) J1.37@-17.97,-39.352 ; -18.24,-38.701 ccw(c-17.32,-38.701) J1.37@-17.97,-39.352 ; -18.24,-38.701 ccw(c-17.32,-38.701) J1.37@-17.97,-39.352 ; -18.24,-38.088 ccw(c-16.707,-38.088) J1.37@-17.791,-39.172 ; -18.24,-38.088 ccw(c-16.707,-38.088) J1.37@-17.791,-39.172 ; -18.24,-38.088 ccw(c-16.707,-38.088) J1.37@-17.791,-39.172 ; J6.4@-2.555,-9.476 cw(c-2.659,-9.781) -2.337,-9.781 ; J6.4@-2.555,-9.476 cw(c-2.659,-9.781) -2.337,-9.781 ; J6.4@-2.555,-9.476 cw(c-2.659,-9.781) -2.337,-9.781 ; -2.337,-9.781 cw(c-2.014,-9.781) J6.4@-2.119,-9.476 ; -2.337,-9.781 cw(c-2.014,-9.781) J6.4@-2.119,-9.476 ; -2.337,-9.781 cw(c-2.014,-9.781) J6.4@-2.119,-9.476
P5: J1.13 J6.8 | length 33.6
  Bottom Layer w0.203: -3.861,-36.504 -4.394,-35.971 -4.394,-33.325 -3.938,-32.868 -3.938,-20.6 J6.8@-2.337,-18.999
  Bottom Layer w0.254: -3.861,-36.504 -3,-37.365 J1.13@-3,-39.621 ; J1.13@-3.449,-39.172 ccw(c-4.533,-38.088) -3,-38.088 ; J1.13@-3.449,-39.172 ccw(c-4.533,-38.088) -3,-38.088 ; J1.13@-3.449,-39.172 ccw(c-4.533,-38.088) -3,-38.088 ; J1.13@-3.269,-39.352 ccw(c-3.919,-38.701) -3,-38.701 ; J1.13@-3.269,-39.352 ccw(c-3.919,-38.701) -3,-38.701 ; J1.13@-3.269,-39.352 ccw(c-3.919,-38.701) -3,-38.701 ; -3,-38.701 ccw(c-2.08,-38.701) J1.13@-2.73,-39.352 ; -3,-38.701 ccw(c-2.08,-38.701) J1.13@-2.73,-39.352 ; -3,-38.701 ccw(c-2.08,-38.701) J1.13@-2.73,-39.352 ; -3,-38.088 ccw(c-1.467,-38.088) J1.13@-2.551,-39.172 ; -3,-38.088 ccw(c-1.467,-38.088) J1.13@-2.551,-39.172 ; -3,-38.088 ccw(c-1.467,-38.088) J1.13@-2.551,-39.172
P8: J1.27 J6.6 | length 49.8
  Bottom Layer w0.203: J1.27@-11.89,-41.521 -11.89,-39.229 -12.956,-38.163 -12.956,-37.126 -11.89,-36.059 -11.89,-34.877 -11.1,-34.087 -6.604,-34.087 -4.75,-32.233 -4.75,-20.142 -3.912,-19.304 -3.912,-16.412 -2.565,-15.064 -2.565,-14.147 J6.6@-2.337,-13.919 ; J6.6@-2.831,-14.413 cw(c-3.473,-15.055) -2.565,-15.055 ; -2.565,-15.087 cw(c-2.064,-15.087) J6.6@-2.178,-14.599 ; -2.565,-14.831 cw(c-2.124,-14.831) J6.6@-2.224,-14.401 ; J1.27@-12.357,-41.054 ccw(c-13.484,-39.927) -11.89,-39.927 ; J1.27@-12.357,-41.054 ccw(c-13.484,-39.927) -11.89,-39.927 ; J1.27@-12.357,-41.054 ccw(c-13.484,-39.927) -11.89,-39.927 ; J1.27@-12.213,-41.198 ccw(c-12.993,-40.417) -11.89,-40.417 ; J1.27@-12.213,-41.198 ccw(c-12.993,-40.417) -11.89,-40.417 ; J1.27@-12.213,-41.198 ccw(c-12.993,-40.417) -11.89,-40.417 ; -11.89,-40.417 ccw(c-10.786,-40.417) J1.27@-11.566,-41.198 ; -11.89,-40.417 ccw(c-10.786,-40.417) J1.27@-11.566,-41.198 ; -11.89,-40.417 ccw(c-10.786,-40.417) J1.27@-11.566,-41.198 ; -11.89,-39.927 ccw(c-10.295,-39.927) J1.27@-11.423,-41.054 ; -11.89,-39.927 ccw(c-10.295,-39.927) J1.27@-11.423,-41.054 ; -11.89,-39.927 ccw(c-10.295,-39.927) J1.27@-11.423,-41.054
P11: J1.33 J6.5 | length 51.3
  Bottom Layer w0.203: -12.852,-33.655 -6.883,-33.655 -5.156,-31.928 -5.156,-19.964 -4.318,-19.126 -4.318,-16.244 -3.441,-15.367 -3.441,-13.462 -2.337,-12.357 ; J6.5@-2.337,-11.379 -2.337,-12.357 ; J6.5@-2.563,-12.04 cw(c-2.672,-12.357) -2.337,-12.357 ; J6.5@-2.563,-12.04 cw(c-2.672,-12.357) -2.337,-12.357 ; J6.5@-2.563,-12.04 cw(c-2.672,-12.357) -2.337,-12.357 ; -2.337,-12.357 cw(c-2.001,-12.357) J6.5@-2.11,-12.04 ; -2.337,-12.357 cw(c-2.001,-12.357) J6.5@-2.11,-12.04 ; -2.337,-12.357 cw(c-2.001,-12.357) J6.5@-2.11,-12.04
  Bottom Layer w0.254: J1.33@-15.7,-39.621 -15.7,-37.365 -14.608,-36.273 -14.608,-35.41 -12.852,-33.655 ; J1.33@-16.149,-39.172 ccw(c-17.233,-38.088) -15.7,-38.088 ; J1.33@-16.149,-39.172 ccw(c-17.233,-38.088) -15.7,-38.088 ; J1.33@-16.149,-39.172 ccw(c-17.233,-38.088) -15.7,-38.088 ; J1.33@-15.969,-39.352 ccw(c-16.619,-38.701) -15.7,-38.701 ; J1.33@-15.969,-39.352 ccw(c-16.619,-38.701) -15.7,-38.701 ; J1.33@-15.969,-39.352 ccw(c-16.619,-38.701) -15.7,-38.701 ; -15.7,-38.701 ccw(c-14.78,-38.701) J1.33@-15.43,-39.352 ; -15.7,-38.701 ccw(c-14.78,-38.701) J1.33@-15.43,-39.352 ; -15.7,-38.701 ccw(c-14.78,-38.701) J1.33@-15.43,-39.352 ; -15.7,-38.088 ccw(c-14.167,-38.088) J1.33@-15.251,-39.172 ; -15.7,-38.088 ccw(c-14.167,-38.088) J1.33@-15.251,-39.172 ; -15.7,-38.088 ccw(c-14.167,-38.088) J1.33@-15.251,-39.172
P13: J1.45 J6.3 | length 56.2
  Bottom Layer w0.203: J1.45@-23.32,-39.621 -22.486,-38.788 ; -15.291,-32.614 -16.612,-32.614 -19.456,-35.458 -19.456,-36.006 -20.983,-37.533 -20.983,-38.163 -21.608,-38.788 -22.486,-38.788 ; J1.45@-23.213,-39.176 ccw(c-23.096,-38.691) -22.743,-39.044 ; J1.45@-23.213,-39.176 ccw(c-23.096,-38.691) -22.743,-39.044 ; J1.45@-23.213,-39.176 ccw(c-23.096,-38.691) -22.743,-39.044 ; J1.45@-23.165,-38.979 ccw(c-22.996,-38.278) -22.486,-38.788 ; J1.45@-23.165,-38.979 ccw(c-22.996,-38.278) -22.486,-38.788 ; J1.45@-23.165,-38.979 ccw(c-22.996,-38.278) -22.486,-38.788 ; J1.45@-22.875,-39.514 cw(c-22.389,-39.397) -22.743,-39.044 ; J1.45@-22.875,-39.514 cw(c-22.389,-39.397) -22.743,-39.044 ; J1.45@-22.875,-39.514 cw(c-22.389,-39.397) -22.743,-39.044 ; J1.45@-22.678,-39.467 cw(c-21.976,-39.298) -22.486,-38.788 ; J1.45@-22.678,-39.467 cw(c-21.976,-39.298) -22.486,-38.788 ; J1.45@-22.678,-39.467 cw(c-21.976,-39.298) -22.486,-38.788
  Bottom Layer w0.254: -15.291,-32.614 -10.084,-32.614 -8.179,-30.709 -8.179,-18.39 -4.33,-14.541 -4.33,-10.858 -3.467,-9.995 -3.467,-8.371 -2.337,-7.241 ; J6.3@-2.337,-6.299 -2.337,-7.241 ; J6.3@-2.555,-6.936 cw(c-2.659,-7.241) -2.337,-7.241 ; J6.3@-2.555,-6.936 cw(c-2.659,-7.241) -2.337,-7.241 ; J6.3@-2.555,-6.936 cw(c-2.659,-7.241) -2.337,-7.241 ; -2.337,-7.241 cw(c-2.014,-7.241) J6.3@-2.119,-6.936 ; -2.337,-7.241 cw(c-2.014,-7.241) J6.3@-2.119,-6.936 ; -2.337,-7.241 cw(c-2.014,-7.241) J6.3@-2.119,-6.936
P14: J1.47 J6.2 | length 69.3
  Bottom Layer w0.203: J1.47@-24.59,-41.521 -24.59,-39.229 -23.117,-37.757 -23.117,-37.127 -22.253,-36.263 -22.253,-35.331 -20.958,-34.036 -19.05,-34.036 -17.196,-32.182 -10.414,-32.182 -8.611,-30.378 -8.611,-18.186 -4.851,-14.427 -4.851,-10.592 -3.988,-9.728 -3.988,-5.41 J6.2@-2.337,-3.759 ; J6.2@-3.035,-3.759 cw(c-4.721,-3.759) -3.529,-4.951 cw(c-2.337,-6.144) J6.2@-2.337,-4.458 ; J6.2@-2.832,-3.759 cw(c-4.028,-3.759) -3.182,-4.605 cw(c-2.337,-5.45) J6.2@-2.337,-4.254 ; J1.47@-25.057,-41.054 ccw(c-26.184,-39.927) -24.59,-39.927 ; J1.47@-25.057,-41.054 ccw(c-26.184,-39.927) -24.59,-39.927 ; J1.47@-25.057,-41.054 ccw(c-26.184,-39.927) -24.59,-39.927 ; J1.47@-24.913,-41.198 ccw(c-25.693,-40.417) -24.59,-40.417 ; J1.47@-24.913,-41.198 ccw(c-25.693,-40.417) -24.59,-40.417 ; J1.47@-24.913,-41.198 ccw(c-25.693,-40.417) -24.59,-40.417 ; -24.59,-40.417 ccw(c-23.486,-40.417) J1.47@-24.266,-41.198 ; -24.59,-40.417 ccw(c-23.486,-40.417) J1.47@-24.266,-41.198 ; -24.59,-40.417 ccw(c-23.486,-40.417) J1.47@-24.266,-41.198 ; -24.59,-39.927 ccw(c-22.995,-39.927) J1.47@-24.123,-41.054 ; -24.59,-39.927 ccw(c-22.995,-39.927) J1.47@-24.123,-41.054 ; -24.59,-39.927 ccw(c-22.995,-39.927) J1.47@-24.123,-41.054
P15: J1.49 J6.1 | length 73.6
  Bottom Layer w0.203: J1.49@-25.86,-39.621 -25.656,-39.418 -25.656,-37.126 -24.638,-36.108 -24.638,-35.306 -22.911,-33.579 -19.329,-33.579 -17.526,-31.775 -10.668,-31.775 -9.017,-30.124 -9.017,-17.983 -5.309,-14.275 -5.309,-10.338 -4.394,-9.423 -4.394,-3.277 J6.1@-2.337,-1.219 ; J6.1@-3.035,-1.219 cw(c-4.721,-1.219) -3.529,-2.411 cw(c-2.337,-3.604) J6.1@-2.337,-1.918 ; J6.1@-2.832,-1.219 cw(c-4.028,-1.219) -3.182,-2.065 cw(c-2.337,-2.91) J6.1@-2.337,-1.714 ; J1.49@-26.327,-39.154 ccw(c-27.945,-37.536) -25.656,-37.536 ; J1.49@-26.327,-39.154 ccw(c-27.945,-37.536) -25.656,-37.536 ; J1.49@-26.327,-39.154 ccw(c-27.945,-37.536) -25.656,-37.536 ; J1.49@-26.183,-39.298 ccw(c-27.454,-38.026) -25.656,-38.026 ; J1.49@-26.183,-39.298 ccw(c-27.454,-38.026) -25.656,-38.026 ; J1.49@-26.183,-39.298 ccw(c-27.454,-38.026) -25.656,-38.026 ; J1.49@-26.039,-39.441 ccw(c-26.964,-38.517) -25.656,-38.517 ; J1.49@-26.039,-39.441 ccw(c-26.964,-38.517) -25.656,-38.517 ; J1.49@-26.039,-39.441 ccw(c-26.964,-38.517) -25.656,-38.517 ; -25.656,-38.518 ccw(c-24.756,-38.518) J1.49@-25.393,-39.154 ; -25.656,-38.518 ccw(c-24.756,-38.518) J1.49@-25.393,-39.154 ; -25.656,-38.518 ccw(c-24.756,-38.518) J1.49@-25.393,-39.154
P16: D1.4 J1.51 | length 25.7
  Top Layer w0.254: v1(-19.685,-30.963) -18.277,-29.555 D1.4@-18.166,-29.555 ; v1@-19.685,-30.79 ccw(c-19.685,-30.372) -19.39,-30.667 ccw(c-19.094,-30.963) v1@-19.512,-30.963 ; -19.065,-30.342 ccw(c-19.852,-29.555) D1.4@-18.739,-29.555 ; -18.731,-30.009 cw(c-18.416,-30.324) D1.4@-18.416,-29.878
  Bottom Layer w0.254: J1.51@-27.579,-41.072 ccw(c-28.663,-39.988) -27.13,-39.988 ccw(c-25.597,-39.988) J1.51@-26.681,-41.072 ; J1.51@-27.399,-41.252 ccw(c-28.049,-40.601) -27.13,-40.601 ccw(c-26.21,-40.601) J1.51@-26.86,-41.252 ; J1.51@-27.13,-41.521 -27.13,-39.265 -28.222,-38.173 -28.222,-37.269 -27.102,-36.149 -27.102,-33.884 -24.181,-30.963 v1(-19.685,-30.963) ; v1@-19.807,-31.085 ccw(c-20.103,-31.38) -20.103,-30.963 ccw(c-20.103,-30.545) v1@-19.807,-30.84
SCL: J1.65 J7.1 J8.1 U1.26 | length 115.3
  Top Layer w0.254: J1.65@-36.02,-39.621 -35.105,-39.621 ; v1@-12.202,-17.352 ccw(c-12.134,-16.786) -11.73,-17.189 ; v1(-12.192,-17.272) -11.813,-17.272 ; v1@-12.171,-17.1 ccw(c-12.055,-16.126) -11.361,-16.82 ; 4.389,-21.026 cw(c3.329,-22.086) J8.1@4.764,-22.521 ; J8.1@4.521,-22.447 ccw(c2.869,-21.947) 4.089,-20.726 ; J7.1@4.679,-25.62 cw(c3.595,-26.704) 5.128,-26.704 cw(c6.661,-26.704) J7.1@5.577,-25.62 ; J7.1@4.679,-24.722 ccw(c3.595,-23.638) 5.128,-23.638 ccw(c6.661,-23.638) J7.1@5.577,-24.722 ; J8.1@4.679,-23.08 cw(c3.595,-24.164) 5.128,-24.164 cw(c6.661,-24.164) J8.1@5.577,-23.08 ; 4.689,-21.326 cw(c3.789,-22.226) J8.1@5.007,-22.595 ; J7.1@4.859,-25.441 cw(c4.209,-26.091) 5.128,-26.091 cw(c6.048,-26.091) J7.1@5.398,-25.441 ; J7.1@4.859,-24.902 ccw(c4.209,-24.252) 5.128,-24.252 ccw(c6.048,-24.252) J7.1@5.398,-24.902 ; J8.1@4.859,-22.901 cw(c4.209,-23.551) 5.128,-23.551 cw(c6.048,-23.551) J8.1@5.398,-22.901 ; 4.989,-21.626 cw(c4.249,-22.365) J8.1@5.25,-22.668 ; J1.65@-35.425,-39.843 cw(c-35.105,-39.962) -35.105,-39.621 ; J1.65@-35.425,-39.843 cw(c-35.105,-39.962) -35.105,-39.621 ; J1.65@-35.425,-39.843 cw(c-35.105,-39.962) -35.105,-39.621 ; J1.65@-35.425,-39.399 ccw(c-35.105,-39.28) -35.105,-39.621 ; J1.65@-35.425,-39.399 ccw(c-35.105,-39.28) -35.105,-39.621 ; J1.65@-35.425,-39.399 ccw(c-35.105,-39.28) -35.105,-39.621 ; -35.105,-39.621 -34.013,-38.529 -32.946,-38.529 -32.662,-38.813 -31.757,-38.813 -31.473,-38.529 -30.406,-38.529 -30.122,-38.813 -29.217,-38.813 -28.933,-38.529 -27.866,-38.529 -27.582,-38.813 -26.677,-38.813 -26.393,-38.529 -25.326,-38.529 -25.042,-38.813 -24.137,-38.813 -23.853,-38.529 -22.786,-38.529 -22.502,-38.813 -21.597,-38.813 -21.313,-38.529 -20.246,-38.529 -19.962,-38.813 -19.057,-38.813 -18.773,-38.529 -17.706,-38.529 -17.422,-38.813 -16.517,-38.813 -16.233,-38.529 -15.166,-38.529 -14.882,-38.813 -13.977,-38.813 -13.693,-38.529 -12.626,-38.529 -12.342,-38.813 -11.437,-38.813 -11.153,-38.529 -10.086,-38.529 -9.802,-38.813 -8.897,-38.813 -8.613,-38.529 -7.546,-38.529 -7.262,-38.813 -6.357,-38.813 -6.073,-38.529 -5.006,-38.529 -4.722,-38.813 -3.817,-38.813 -3.533,-38.529 -2.466,-38.529 -2.182,-38.813 -1.277,-38.813 -0.993,-38.529 0.074,-38.529 0.358,-38.813 1.263,-38.813 1.902,-38.173 1.902,-37.543 3.172,-36.273 3.172,-35.639 5.128,-33.683 J7.1@5.128,-25.171 J8.1@5.128,-22.631 5.128,-21.765 4.089,-20.726 ; v1@-12.061,-17.385 cw(c-11.813,-17.601) -11.813,-17.272 ; v1@-12.061,-17.385 cw(c-11.813,-17.601) -11.813,-17.272 ; v1@-12.061,-17.385 cw(c-11.813,-17.601) -11.813,-17.272 ; v1@-12.061,-17.159 ccw(c-11.813,-16.943) -11.813,-17.272 ; v1@-12.061,-17.159 ccw(c-11.813,-16.943) -11.813,-17.272 ; v1@-12.061,-17.159 ccw(c-11.813,-16.943) -11.813,-17.272 ; -11.813,-17.272 -11.361,-16.82 ; -11.361,-16.82 -10.79,-16.82 -9.615,-17.995 -5.703,-17.995 -2.972,-20.726 4.089,-20.726 ; J8.1@4.937,-22.026 ccw(c4.855,-21.765) 5.128,-21.765 ; J8.1@4.937,-22.026 ccw(c4.855,-21.765) 5.128,-21.765 ; J8.1@4.937,-22.026 ccw(c4.855,-21.765) 5.128,-21.765 ; 5.128,-21.765 ccw(c5.401,-21.765) J8.1@5.319,-22.026 ; 5.128,-21.765 ccw(c5.401,-21.765) J8.1@5.319,-22.026 ; 5.128,-21.765 ccw(c5.401,-21.765) J8.1@5.319,-22.026
  Bottom Layer w0.254: U1.26@-17.734,-9.719 -17.734,-11.462 -12.192,-17.004 v1(-12.192,-17.272) ; -12.677,-16.519 cw(c-13.43,-17.272) v1@-12.365,-17.272 ; -12.243,-16.953 cw(c-12.563,-17.272) v1@-12.111,-17.272
SDA: J1.67 J7.2 J8.2 U1.27 | length 112.4
  Top Layer w0.254: J1.67@-37.29,-41.521 -36.375,-41.521 ; v1@-11.1,-17.623 cw(c-11.1,-18.04) -10.804,-17.745 cw(c-10.509,-17.45) v1@-10.927,-17.45 ; v1(-11.1,-17.45) -10.098,-18.452 -5.898,-18.452 -3.167,-21.183 1.727,-21.183 ; J8.2@1.994,-22.409 ccw(c0.907,-22.004) 1.727,-21.183 ; 2.006,-21.463 cw(c1.314,-22.156) J8.2@2.231,-22.498 ; J7.2@2.139,-24.722 ccw(c1.055,-23.638) 2.588,-23.638 ccw(c4.121,-23.638) J7.2@3.037,-24.722 ; J8.2@2.139,-23.08 cw(c1.055,-24.164) 2.588,-24.164 cw(c4.121,-24.164) J8.2@3.037,-23.08 ; 2.286,-21.742 cw(c1.721,-22.307) J8.2@2.469,-22.587 ; J7.2@2.319,-24.902 ccw(c1.669,-24.252) 2.588,-24.252 ccw(c3.508,-24.252) J7.2@2.858,-24.902 ; J8.2@2.319,-22.901 cw(c1.669,-23.551) 2.588,-23.551 cw(c3.508,-23.551) J8.2@2.858,-22.901 ; J7.2@2.588,-25.171 J8.2@2.588,-22.631 2.588,-22.045 1.727,-21.183 ; 5.893,-28.543 cw(c7.004,-28.543) v1@6.218,-27.758 ; 5.893,-27.93 cw(c6.391,-27.93) v1@6.039,-27.578 ; v1(6.096,-27.635) 5.893,-27.838 5.893,-36.723 3.528,-39.087 3.528,-39.804 2.903,-40.429 2.898,-40.429 2.614,-40.713 1.628,-40.713 1.344,-40.429 0.358,-40.429 0.074,-40.713 -0.912,-40.713 -1.196,-40.429 -2.182,-40.429 -2.466,-40.713 -3.452,-40.713 -3.736,-40.429 -4.722,-40.429 -5.006,-40.713 -5.992,-40.713 -6.276,-40.429 -7.262,-40.429 -7.546,-40.713 -8.532,-40.713 -8.816,-40.429 -9.802,-40.429 -10.086,-40.713 -11.072,-40.713 -11.356,-40.429 -12.342,-40.429 -12.626,-40.713 -13.612,-40.713 -13.896,-40.429 -14.882,-40.429 -15.166,-40.713 -16.152,-40.713 -16.436,-40.429 -17.422,-40.429 -17.706,-40.713 -18.692,-40.713 -18.976,-40.429 -19.962,-40.429 -20.246,-40.713 -21.313,-40.713 -21.597,-40.429 -22.583,-40.429 -22.867,-40.713 -23.853,-40.713 -24.137,-40.429 -25.123,-40.429 -25.407,-40.713 -26.393,-40.713 -26.677,-40.429 -27.663,-40.429 -27.947,-40.713 -28.933,-40.713 -29.217,-40.429 -30.203,-40.429 -30.487,-40.713 -31.473,-40.713 -31.757,-40.429 -32.743,-40.429 -33.027,-40.713 -34.013,-40.713 -34.297,-40.429 -35.283,-40.429 -36.375,-41.521 ; J1.67@-36.695,-41.743 cw(c-36.375,-41.862) -36.375,-41.521 ; J1.67@-36.695,-41.743 cw(c-36.375,-41.862) -36.375,-41.521 ; J1.67@-36.695,-41.743 cw(c-36.375,-41.862) -36.375,-41.521 ; J1.67@-36.695,-41.299 ccw(c-36.375,-41.18) -36.375,-41.521 ; J1.67@-36.695,-41.299 ccw(c-36.375,-41.18) -36.375,-41.521 ; J1.67@-36.695,-41.299 ccw(c-36.375,-41.18) -36.375,-41.521
  Bottom Layer w0.254: U1.27@-17.084,-9.719 -17.084,-11.466 v1(-11.1,-17.45) ; v1@-11.273,-17.45 ccw(c-11.69,-17.45) -11.395,-17.154 ccw(c-11.1,-16.859) v1@-11.1,-17.277 ; J7.2@2.588,-25.806 cw(c2.588,-27.339) 3.672,-26.255 cw(c4.756,-25.171) J7.2@3.223,-25.171 ; J7.2@2.588,-25.552 cw(c2.588,-26.472) 3.239,-25.822 cw(c3.889,-25.171) J7.2@2.969,-25.171 ; J7.2@2.588,-25.171 5.052,-27.635 v1(6.096,-27.635) ; v1@5.974,-27.758 ccw(c5.678,-28.053) 5.678,-27.635 ccw(c5.678,-27.218) v1@5.974,-27.513
VBAT: Bat.1 Q2.3 U3.3 | length 34.3
  Bottom Layer w0.254: U3.3@-22.504,2.306 -21.001,2.306 -19.99,1.295 -17.805,1.295 -15.894,-0.616 -7.575,-0.616 ; Bat.1@-7.875,-10.855 ccw(c-8.597,-10.133) -7.575,-10.133 ccw(c-6.554,-10.133) Bat.1@-7.276,-10.855 ; Bat.1@-7.575,-11.854 -7.575,-0.616 ; Q2.3@-7.471,1.443 cw(c-8.121,0.792) -7.201,0.792 cw(c-6.281,0.792) Q2.3@-6.932,1.443 ; Q2.3@-7.201,1.712 -7.201,-0.242 -7.575,-0.616 ; U3.3@-22.167,2.219 cw(c-21.957,2.009) -21.957,2.306 ; U3.3@-22.167,2.219 cw(c-21.957,2.009) -21.957,2.306 ; U3.3@-22.167,2.219 cw(c-21.957,2.009) -21.957,2.306 ; U3.3@-22.167,2.393 ccw(c-21.957,2.603) -21.957,2.306 ; U3.3@-22.167,2.393 ccw(c-21.957,2.603) -21.957,2.306 ; U3.3@-22.167,2.393 ccw(c-21.957,2.603) -21.957,2.306